# EAGLE board Main_Board_V1.0 (EAGLE 9.6.2)
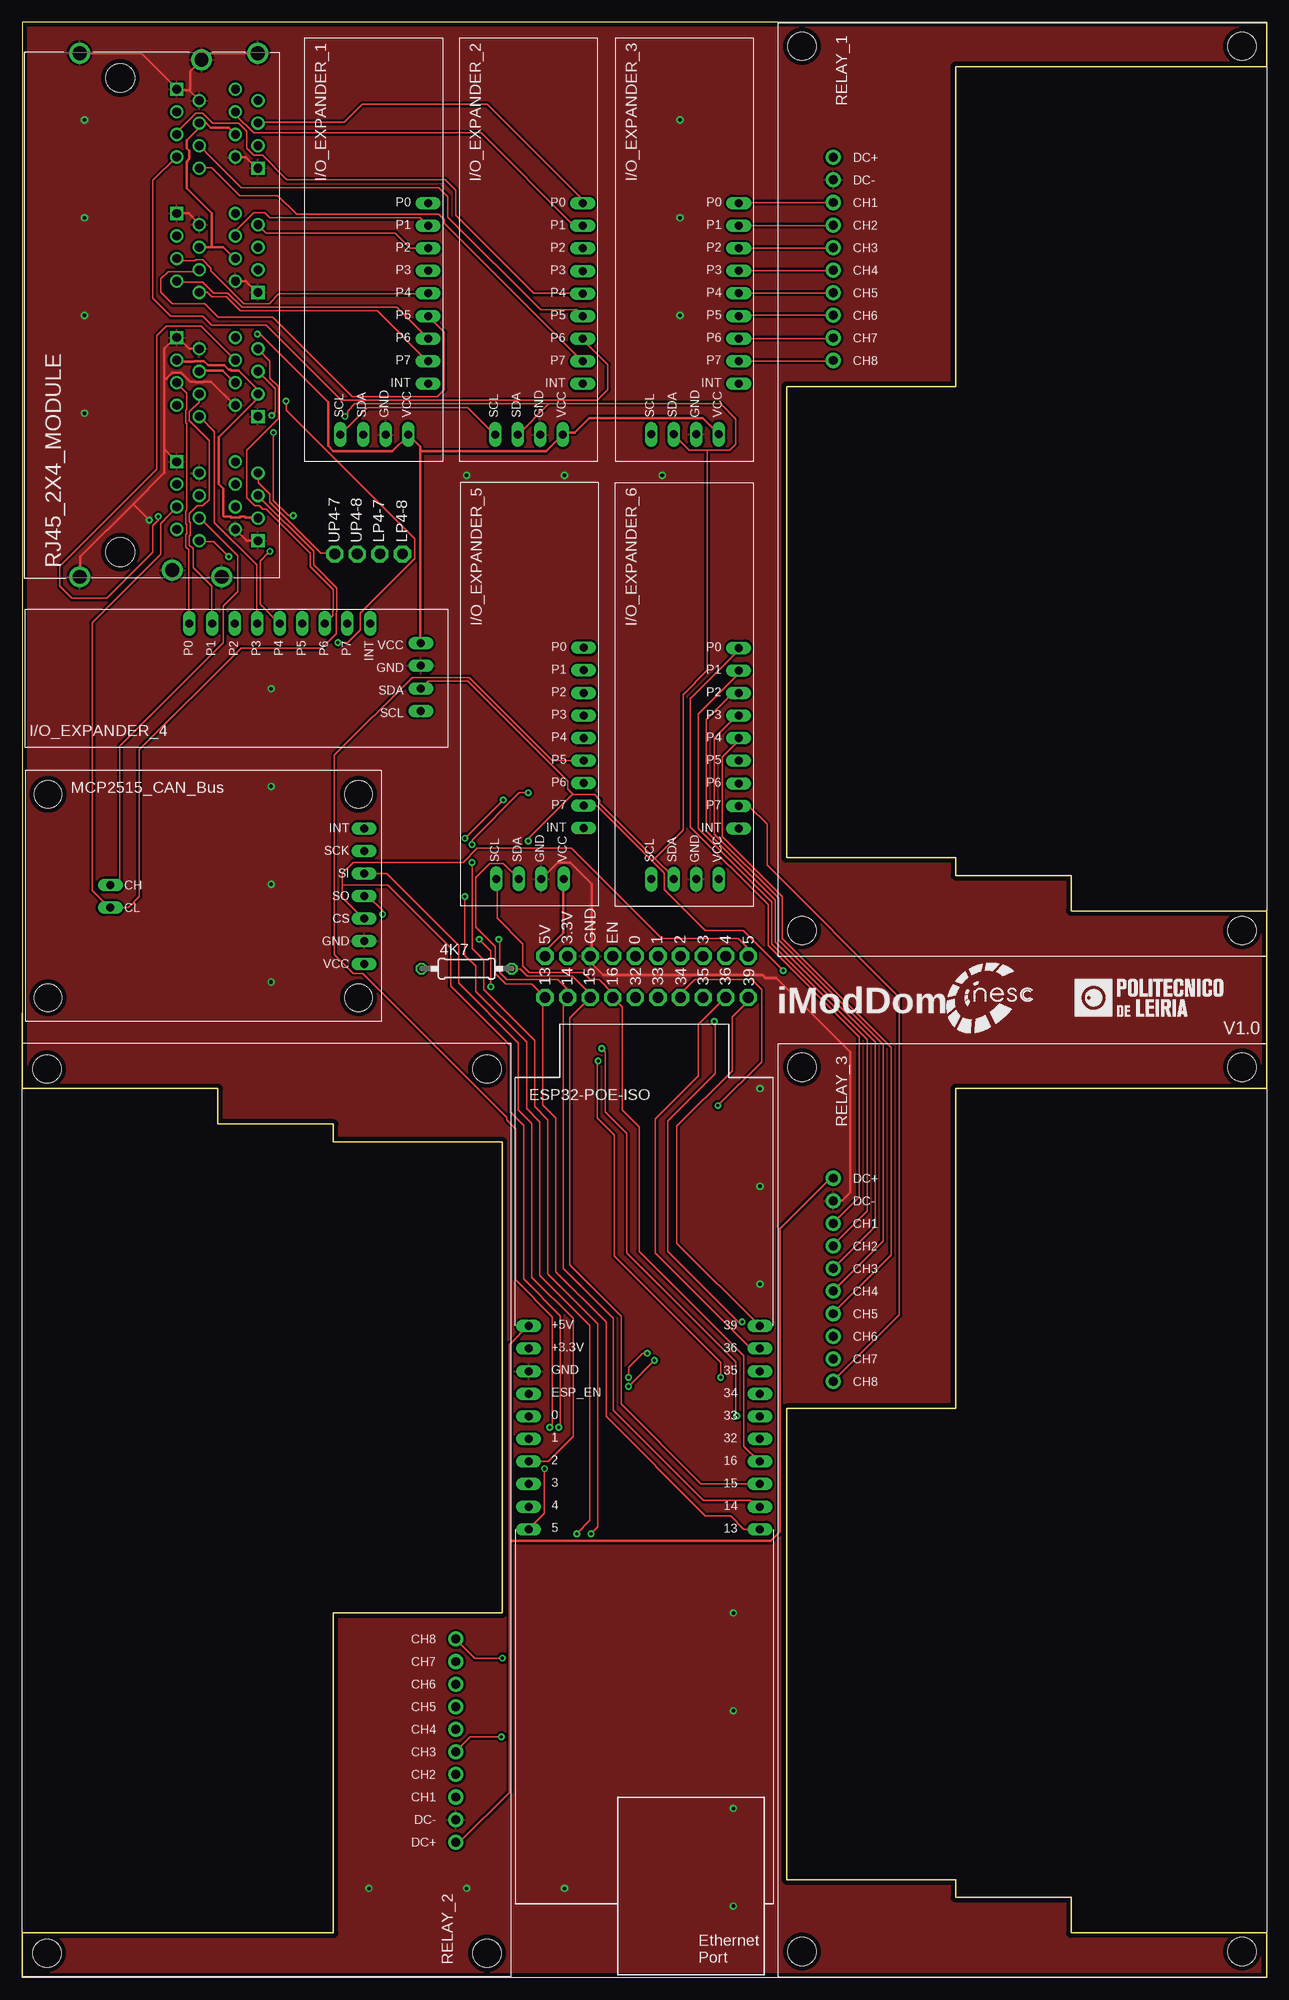
[diagram p0: board, top side]
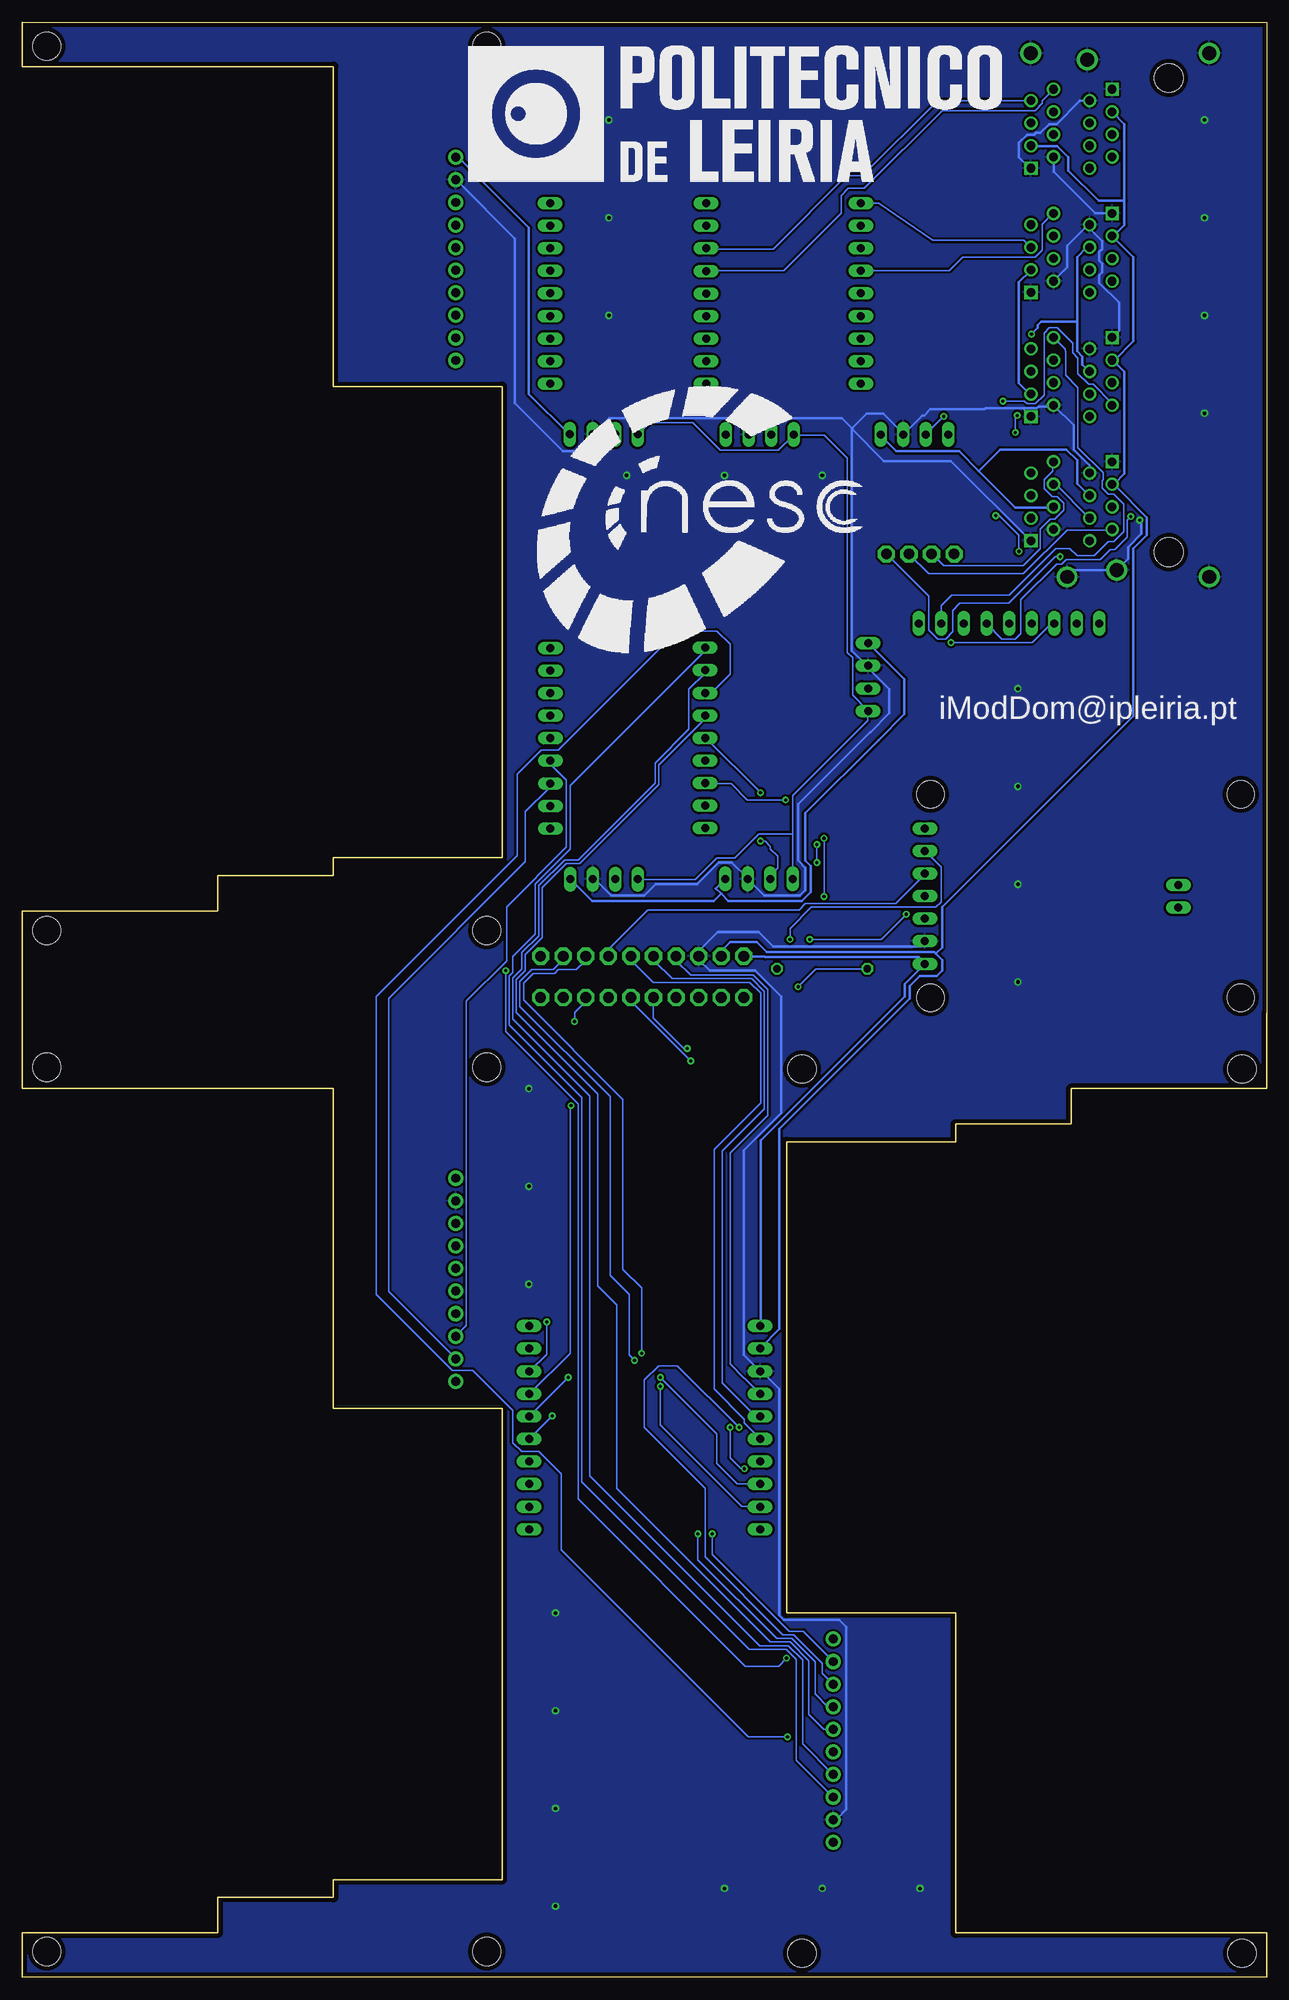
[diagram p1: board, bottom side, seen from below]

Size 140 x 220 mm. Coordinates in mm from the lower left corner, seen from the top.
Outline: 0,0 140,0 140,5 118,5 118,9 105,9 105,11 86,11 86,64 105,64 105,100 140,100 140,120 118,120 118,124 105,124 105,126 86,126 86,179 105,179 105,215 140,215 140,220 0,220 0,108.5 0,100 22,100 22,96 35,96 35,94 54,94 54,41 35,41 35,5 0,5 0,0
Copper layers (1*16): Top 0.035mm / dielectric 1.5mm / Bottom 0.035mm
Design rules "default *": minimum track width 6mil, minimum drill 0.35mm, track to track 0.25mm, track to pad 0.25mm, pad to pad 6mil, via to via 6mil, smd to smd 6mil, copper to edge 0.5mm, drill to drill 6mil, minimum pad ring 10mil, minimum via ring 8mil, stop-mask expansion 4mil, vias tented up to drill 0mil, thermal gap 10mil
Net classes: 0 default: width 0.15 mm; 1 +5V: width 0.305 mm; 2 GND: width 0.305 mm; 3 +3.3V: width 0.305 mm; 4 SCL: width 0.15 mm; 5 SDA: width 0.15 mm

## Footprints (pad centres in the part's own frame; a part is rotated, then mirrored left to right if it is on the bottom)
0207/10 = drill 0.813 octagon: 1 -5.08,0; 2 5.08,0
ESP-POE = drill 0.9 pad 1.3 long: 0 0,-10.16; 1 0,-12.7; 2 0,-15.24; 3 0,-17.78; 3V3 0,-2.54; 4 0,-20.32; 5 0,-22.86; 5V 0,0; 13 26,-22.86; 14 26,-20.32; 15 26,-17.78; 16 26,-15.24; 32 26,-12.7; 33 26,-10.16; 34 26,-7.62; 35 26,-5.08; 36 26,-2.54; 39 26,0; ESP_EN 0,-7.62; GND 0,-5.08
PCF8574-MODULE_ESPELHADO = drill 0.9 pad 1.3 long: GND 0,-5.08; INT 5.71,-9.85; P0 26.03,-9.85; P1 23.49,-9.85; P2 20.95,-9.85; P3 18.41,-9.85; P4 15.87,-9.85; P5 13.33,-9.85; P6 10.79,-9.85; P7 8.25,-9.85; SCL 0,0; SDA 0,-2.54; VCC 0,-7.62
SSR_M_SEM_LIGACOES = drill 1 pad 1.7: CH1 17.58,3.5; CH2 20.12,3.5; CH3 22.66,3.5; CH4 25.2,3.5; CH5 27.74,3.5; CH6 30.28,3.5; CH7 32.82,3.5; CH8 35.36,3.5; DC+ 12.5,3.5; DC- 15.04,3.5 | hole 3.2: 0,0; 99.5,0; 99.5,49.5; 0,49.5
TE_5569262-1 = drill 0.97 square: LP1-1 0,0; LP2-1 13.97,0; LP3-1 27.94,0; LP4-1 41.91,0; UP1-1 8.89,9.14; UP2-1 22.86,9.14; UP3-1 36.83,9.14; UP4-1 50.8,9.14 | drill 0.97: LP1-2 1.27,2.54; LP1-3 2.54,0; LP1-4 3.81,2.54; LP1-5 5.08,0; LP1-6 6.35,2.54; LP1-7 7.62,0; LP1-8 8.89,2.54; LP2-2 15.24,2.54; LP2-3 16.51,0; LP2-4 17.78,2.54; LP2-5 19.05,0; LP2-6 20.32,2.54; LP2-7 21.59,0; LP2-8 22.86,2.54; LP3-2 29.21,2.54; LP3-3 30.48,0; LP3-4 31.75,2.54; LP3-5 33.02,0; LP3-6 34.29,2.54; LP3-7 35.56,0; LP3-8 36.83,2.54; LP4-2 43.18,2.54; LP4-3 44.45,0; LP4-4 45.72,2.54; LP4-5 46.99,0; LP4-6 48.26,2.54; LP4-7 49.53,0; LP4-8 50.8,2.54; UP1-2 7.62,6.6; UP1-3 6.35,9.14; UP1-4 5.08,6.6; UP1-5 3.81,9.14; UP1-6 2.54,6.6; UP1-7 1.27,9.14; UP1-8 0,6.6; UP2-2 21.59,6.6; UP2-3 20.32,9.14; UP2-4 19.05,6.6; UP2-5 17.78,9.14; UP2-6 16.51,6.6; UP2-7 15.24,9.14; UP2-8 13.97,6.6; UP3-2 35.56,6.6; UP3-3 34.29,9.14; UP3-4 33.02,6.6; UP3-5 31.75,9.14; UP3-6 30.48,6.6; UP3-7 29.21,9.14; UP3-8 27.94,6.6; UP4-2 49.53,6.6; UP4-3 48.26,9.14; UP4-4 46.99,6.6; UP4-5 45.72,9.14; UP4-6 44.45,6.6; UP4-7 43.18,9.14; UP4-8 41.91,6.6 | drill 1.57: S1 -4.06,-10.92; S2 54.87,-10.92; S3 -4.06,9.14; S4 54.11,-0.51; S5 -3.3,2.79; S6 54.87,5.08 | hole 3.25: -1.27,-6.35; 52.08,-6.35
TP = drill 1.2 pad 1.93 octagon: P$1 0,0
MCP2515_MODULE_SEM_LIGACOES = drill 0.9 pad 1.3 long: CH -27.925,12.703; CL -27.925,10.163; CS 0.605,8.923; GND 0.605,6.383; INT 0.605,19.083; MISO 0.605,11.463; MOSI 0.605,14.003; SCK 0.605,16.543; VCC 0.605,3.843 | hole 3.1: -0.035,0.013; -0.035,22.913; -34.935,22.913; -34.935,0.013

## Placement (x,y rotation side)
4K7  [0207/10]  50,113.5 0 top
ESP32-POE-ISO  ESP-POE  [ESP-POE]  56.98,73.28 0 top
I/O_EXPANDER_1  PCF8574-MODULE_ESPELHADO  [PCF8574-MODULE_ESPELHADO]  35.81,173.62 90 top
I/O_EXPANDER_2  PCF8574-MODULE_ESPELHADO  [PCF8574-MODULE_ESPELHADO]  53.21,173.6 90 top
I/O_EXPANDER_3  PCF8574-MODULE_ESPELHADO  [PCF8574-MODULE_ESPELHADO]  70.76,173.62 90 top
I/O_EXPANDER_4  PCF8574-MODULE_ESPELHADO  [PCF8574-MODULE_ESPELHADO]  44.84,142.5 180 top
I/O_EXPANDER_5  PCF8574-MODULE_ESPELHADO  [PCF8574-MODULE_ESPELHADO]  53.32,123.59 90 top
I/O_EXPANDER_6  PCF8574-MODULE_ESPELHADO  [PCF8574-MODULE_ESPELHADO]  70.74,123.56 90 top
RELAY_1  SSR_M_FULL_SEM_LIGACOES  [SSR_M_SEM_LIGACOES]  87.74,217.3 270 top
RELAY_2  SSR_M_FULL_SEM_LIGACOES  [SSR_M_SEM_LIGACOES]  52.28,2.7 90 top
RELAY_3  SSR_M_FULL_SEM_LIGACOES  [SSR_M_SEM_LIGACOES]  87.74,102.41 270 top
RJ45_2X4_MODULE  5569262-1  [TE_5569262-1]  17.38,212.46 270 top
U$1  TP  [TP]  35.16,160.16 90 top
U$2  TP  [TP]  58.82,114.9 90 top
U$4  TP  [TP]  37.7,160.16 0 bottom
U$5  TP  [TP]  40.24,160.16 0 top
U$6  TP  [TP]  61.36,114.9 90 bottom
U$7  TP  [TP]  63.9,114.9 90 top
U$8  TP  [TP]  66.44,114.9 90 top
U$9  TP  [TP]  68.98,114.9 90 top
U$10  TP  [TP]  71.52,114.9 90 top
U$11  TP  [TP]  74.06,114.9 90 top
U$12  TP  [TP]  76.6,114.9 90 bottom
U$13  TP  [TP]  79.14,114.9 90 bottom
U$14  TP  [TP]  81.68,114.9 90 top
U$15  TP  [TP]  81.68,110.26 270 bottom
U$16  TP  [TP]  79.14,110.26 270 top
U$17  TP  [TP]  76.6,110.26 270 top
U$18  TP  [TP]  74.06,110.26 270 top
U$19  TP  [TP]  71.52,110.26 270 top
U$20  TP  [TP]  68.98,110.26 270 top
U$21  TP  [TP]  66.44,110.26 270 top
U$22  TP  [TP]  63.9,110.26 270 top
U$23  TP  [TP]  61.36,110.26 270 top
U$24  TP  [TP]  58.82,110.26 270 top
U$25  TP  [TP]  42.78,160.16 0 top
U$26  MCP2515_MODULE_SEM_LIGACOES  [MCP2515_MODULE_SEM_LIGACOES]  37.85,110.2 0 top

## Library data of the parts
4K7 = rcl; SPICEPREFIX: R
ESP32-POE-ISO = ESP-POE-RevB
I/O_EXPANDER_1-I/O_EXPANDER_6 = PCF8574_Module
RELAY_1-RELAY_3 = Solid-State-Relay_Module
RJ45_2X4_MODULE = RJ45_2x4; AVAILABILITY: Good; CENTERLINE_PITCH: 1.02 mm[.04 in]; COMMENT: 5569262-1; DESCRIPTION: Conn RJ-45 F 64 POS 2.54mm Solder RA Thru-Hole 64 Terminal 8 Port Cat 5 Tray; EU_ROHS_COMPLIANCE: Compliant; MF: TE Connectivity; MP: 5569262-1; NUMBER_OF_POSITIONS: 8; PACKAGE: None; PRICE: None; PURCHASE-URL: https://pricing.snapeda.com/search/part/5569262-1/?ref=eda
U$1 U$2 U$4-U$25 = edurobotParts
U$26 = MCP2515_Module

## Nets
+3V3 [+3.3V]: ESP32-POE-ISO.3V3 RJ45_2X4_MODULE.LP1-3 RJ45_2X4_MODULE.LP2-3 RJ45_2X4_MODULE.LP3-3 RJ45_2X4_MODULE.LP4-3 RJ45_2X4_MODULE.UP1-3 RJ45_2X4_MODULE.UP2-3 RJ45_2X4_MODULE.UP3-3 RJ45_2X4_MODULE.UP4-3 U$6.P$1
+5V [+5V]: ESP32-POE-ISO.5V I/O_EXPANDER_1.VCC I/O_EXPANDER_2.VCC I/O_EXPANDER_3.VCC I/O_EXPANDER_4.VCC I/O_EXPANDER_5.VCC I/O_EXPANDER_6.VCC RELAY_1.DC+ RELAY_2.DC+ RELAY_3.DC+ RJ45_2X4_MODULE.LP1-4 RJ45_2X4_MODULE.LP2-4 RJ45_2X4_MODULE.LP3-4 RJ45_2X4_MODULE.LP4-4 RJ45_2X4_MODULE.UP1-4 RJ45_2X4_MODULE.UP2-4 RJ45_2X4_MODULE.UP3-4 RJ45_2X4_MODULE.UP4-4 U$2.P$1 U$26.VCC
GND [GND]: ESP32-POE-ISO.GND I/O_EXPANDER_1.GND I/O_EXPANDER_2.GND I/O_EXPANDER_3.GND I/O_EXPANDER_4.GND I/O_EXPANDER_5.GND I/O_EXPANDER_6.GND RELAY_1.DC- RELAY_2.DC- RELAY_3.DC- RJ45_2X4_MODULE.LP1-1 RJ45_2X4_MODULE.LP1-2 RJ45_2X4_MODULE.LP2-1 RJ45_2X4_MODULE.LP2-2 RJ45_2X4_MODULE.LP3-1 RJ45_2X4_MODULE.LP3-2 RJ45_2X4_MODULE.LP4-1 RJ45_2X4_MODULE.LP4-2 RJ45_2X4_MODULE.S1 RJ45_2X4_MODULE.S2 RJ45_2X4_MODULE.S3 RJ45_2X4_MODULE.S4 RJ45_2X4_MODULE.S5 RJ45_2X4_MODULE.S6 RJ45_2X4_MODULE.UP1-1 RJ45_2X4_MODULE.UP1-2 RJ45_2X4_MODULE.UP2-1 RJ45_2X4_MODULE.UP2-2 RJ45_2X4_MODULE.UP3-1 RJ45_2X4_MODULE.UP3-2 RJ45_2X4_MODULE.UP4-1 RJ45_2X4_MODULE.UP4-2 U$7.P$1 U$26.GND
N$1 [SCL]: I/O_EXPANDER_1.P7 RJ45_2X4_MODULE.LP2-8
N$2 [SCL]: I/O_EXPANDER_1.P6 RJ45_2X4_MODULE.LP2-7
N$3 [SCL]: I/O_EXPANDER_1.P5 RJ45_2X4_MODULE.LP2-6
N$4: ESP32-POE-ISO.ESP_EN U$8.P$1
N$5: ESP32-POE-ISO.0 U$9.P$1
N$6: ESP32-POE-ISO.1 U$10.P$1
N$7: ESP32-POE-ISO.2 U$11.P$1 U$26.MOSI
N$8: ESP32-POE-ISO.3 U$12.P$1
N$9: ESP32-POE-ISO.4 U$13.P$1
N$10: ESP32-POE-ISO.5 U$14.P$1 U$26.CS
N$11: ESP32-POE-ISO.39 U$15.P$1
N$12: ESP32-POE-ISO.36 U$16.P$1
N$13: ESP32-POE-ISO.35 U$17.P$1
N$14: ESP32-POE-ISO.34 U$18.P$1
N$15: ESP32-POE-ISO.33 U$19.P$1
N$16: ESP32-POE-ISO.32 U$20.P$1
N$18: 4K7.2 ESP32-POE-ISO.15 U$22.P$1
N$19: ESP32-POE-ISO.14 U$23.P$1 U$26.SCK
N$21: I/O_EXPANDER_3.P0 RELAY_1.CH1
N$22: I/O_EXPANDER_3.P1 RELAY_1.CH2
N$23: I/O_EXPANDER_3.P2 RELAY_1.CH3
N$24: I/O_EXPANDER_3.P3 RELAY_1.CH4
N$25: I/O_EXPANDER_3.P4 RELAY_1.CH5
N$26 [SCL]: I/O_EXPANDER_1.P4 RJ45_2X4_MODULE.LP2-5
N$27: I/O_EXPANDER_3.P5 RELAY_1.CH6
N$28: I/O_EXPANDER_3.P6 RELAY_1.CH7
N$29: I/O_EXPANDER_3.P7 RELAY_1.CH8
N$30: I/O_EXPANDER_6.P0 RELAY_3.CH1
N$31: I/O_EXPANDER_6.P1 RELAY_3.CH2
N$32: I/O_EXPANDER_6.P2 RELAY_3.CH3
N$33: I/O_EXPANDER_6.P3 RELAY_3.CH4
N$34: I/O_EXPANDER_6.P4 RELAY_3.CH5
N$35: I/O_EXPANDER_6.P5 RELAY_3.CH6
N$36: I/O_EXPANDER_6.P6 RELAY_3.CH7
N$37: I/O_EXPANDER_6.P7 RELAY_3.CH8
N$38: I/O_EXPANDER_5.P0 RELAY_2.CH1
N$39: I/O_EXPANDER_5.P1 RELAY_2.CH2
N$40: I/O_EXPANDER_5.P2 RELAY_2.CH3
N$41: I/O_EXPANDER_5.P3 RELAY_2.CH4
N$42: I/O_EXPANDER_5.P4 RELAY_2.CH5
N$43: I/O_EXPANDER_5.P5 RELAY_2.CH6
N$44: I/O_EXPANDER_5.P6 RELAY_2.CH7
N$45: I/O_EXPANDER_5.P7 RELAY_2.CH8
N$46 [SCL]: I/O_EXPANDER_1.P3 RJ45_2X4_MODULE.UP2-8
N$47 [SCL]: I/O_EXPANDER_1.P2 RJ45_2X4_MODULE.UP2-7
N$48 [SCL]: I/O_EXPANDER_1.P1 RJ45_2X4_MODULE.UP2-6
N$49 [SCL]: I/O_EXPANDER_1.P0 RJ45_2X4_MODULE.UP2-5
N$50 [SCL]: I/O_EXPANDER_2.P0 RJ45_2X4_MODULE.UP1-5
N$51 [SCL]: I/O_EXPANDER_2.P1 RJ45_2X4_MODULE.UP1-6
N$52 [SCL]: I/O_EXPANDER_2.P2 RJ45_2X4_MODULE.UP1-7
N$53 [SCL]: I/O_EXPANDER_2.P3 RJ45_2X4_MODULE.UP1-8
N$54 [SCL]: I/O_EXPANDER_2.P4 RJ45_2X4_MODULE.LP1-5
N$55 [SCL]: I/O_EXPANDER_2.P5 RJ45_2X4_MODULE.LP1-6
N$56 [SCL]: I/O_EXPANDER_2.P6 RJ45_2X4_MODULE.LP1-7
N$57 [SCL]: I/O_EXPANDER_2.P7 RJ45_2X4_MODULE.LP1-8
N$58 [SCL]: RJ45_2X4_MODULE.LP4-5 RJ45_2X4_MODULE.UP4-5 U$26.CL
N$60 [SCL]: I/O_EXPANDER_4.P7 RJ45_2X4_MODULE.UP3-8
N$61 [SCL]: I/O_EXPANDER_4.P6 RJ45_2X4_MODULE.UP3-7
N$62 [SCL]: I/O_EXPANDER_4.P5 RJ45_2X4_MODULE.UP3-6
N$63 [SCL]: I/O_EXPANDER_4.P4 RJ45_2X4_MODULE.UP3-5
N$64: I/O_EXPANDER_4.P0 RJ45_2X4_MODULE.LP3-5
N$65: I/O_EXPANDER_4.P1 RJ45_2X4_MODULE.LP3-6
N$66: I/O_EXPANDER_4.P2 RJ45_2X4_MODULE.LP3-7
N$67: I/O_EXPANDER_4.P3 RJ45_2X4_MODULE.LP3-8
N$68: 4K7.1 U$26.MISO
N$69: RJ45_2X4_MODULE.UP4-7 U$1.P$1
N$70: RJ45_2X4_MODULE.UP4-8 U$4.P$1
N$71: RJ45_2X4_MODULE.LP4-7 U$5.P$1
N$72: RJ45_2X4_MODULE.LP4-8 U$25.P$1
N$73 [SCL]: RJ45_2X4_MODULE.LP4-6 RJ45_2X4_MODULE.UP4-6 U$26.CH
SCL: ESP32-POE-ISO.16 I/O_EXPANDER_1.SCL I/O_EXPANDER_2.SCL I/O_EXPANDER_3.SCL I/O_EXPANDER_4.SCL I/O_EXPANDER_5.SCL I/O_EXPANDER_6.SCL U$21.P$1
SDA: ESP32-POE-ISO.13 I/O_EXPANDER_1.SDA I/O_EXPANDER_2.SDA I/O_EXPANDER_3.SDA I/O_EXPANDER_4.SDA I/O_EXPANDER_5.SDA I/O_EXPANDER_6.SDA U$24.P$1

## Tracks (layer width: path | path; a pad name or v marks a point on that pad's centre or on a via)
+3V3
  Top 0.305: RJ45_2X4_MODULE.UP4-3 26.46,164.28 25.15,164.28 25.05,164.38 24.55,164.38 24.45,164.28 23.54,164.28 23.44,164.38 22.74,164.38 22.64,164.48 22.64,167.5 22.13,168 22.13,173.33 26.46,177.66 26.46,178.16 RJ45_2X4_MODULE.UP3-3 26.36,178.26 26.36,178.77 24.34,180.78 23.54,180.78 23.44,180.88 23.24,180.88 22.74,181.38 20.93,181.38 20.42,181.88 19.42,181.88 19.32,181.78 17.5,181.78 17.4,181.88 RJ45_2X4_MODULE.LP3-3
  Bottom 0.305: RJ45_2X4_MODULE.UP2-3 26.56,192.04 27.87,190.74 27.87,179.37 26.76,178.26 26.56,178.26 RJ45_2X4_MODULE.UP3-3 | 15.99,199.89 15.99,197.18 17.2,195.97 RJ45_2X4_MODULE.LP2-3 17.3,195.87 14.99,193.56 14.99,184.09 17.1,181.99 RJ45_2X4_MODULE.LP3-3 17.3,181.99 15.99,180.68 15.99,169.21 17.1,168.1 17.3,168.1 RJ45_2X4_MODULE.LP4-3 17,168 17,167.8 13.48,164.28 13.48,162.27 14.99,160.76 14.99,141.95 36.52,120.42 36.52,115.89 37.22,115.19 | 15.99,199.89 15.99,208.54 17.3,209.85 RJ45_2X4_MODULE.LP1-3 | 15.99,199.89 18.91,199.89 22.33,203.31 22.33,204.82 23.54,206.03 24.45,206.03 25.15,206.03 26.46,206.03 RJ45_2X4_MODULE.UP1-3 | 37.22,115.19 37.42,115.39 56.23,115.39 57.34,116.5 60.36,116.5 61.27,115.59 61.27,114.99 U$6.P$1 | 37.22,115.19 36.52,114.48 36.52,113.28 37.12,112.67 39.03,112.67 40.14,111.56 40.14,110.16 54.83,95.47 54.83,72.94 56.94,70.82 ESP32-POE-ISO.3V3
+5V  (via drill 0.35)
  Top 0.305: I/O_EXPANDER_3.VCC 78.37,173.64 76.56,175.45 63.77,175.45 62.17,173.84 61.07,173.84 60.86,173.64 I/O_EXPANDER_2.VCC 60.76,173.53 58.95,171.72 44.77,171.72 | RJ45_2X4_MODULE.UP1-4 23.94,207.44 23.24,208.14 21.23,208.14 20.72,208.64 20.02,208.64 RJ45_2X4_MODULE.LP1-4 19.82,208.54 19.82,208.04 18.51,206.73 18.51,205.83 18.81,205.53 18.81,204.62 18.51,204.32 18.51,201.3 21.33,198.48 21.33,194.66 | RJ45_2X4_MODULE.LP3-4 20.02,180.78 22.53,180.78 23.94,179.37 RJ45_2X4_MODULE.UP3-4 | 21.33,194.66 22.64,194.66 23.94,193.35 RJ45_2X4_MODULE.UP2-4 | 21.33,194.66 20.02,194.66 RJ45_2X4_MODULE.LP2-4 | 44.77,171.72 44.77,172.23 43.46,173.53 I/O_EXPANDER_1.VCC 43.36,173.43 41.65,171.72 35.01,171.72 34.41,172.33 34.41,177.26 26.76,184.9 v26.46,184.9 | 44.77,171.72 44.77,150.2 I/O_EXPANDER_4.VCC | I/O_EXPANDER_5.VCC 60.86,123.54 60.86,117.5 58.85,115.49 58.85,114.99 U$2.P$1 | 54.83,49.09 54.83,71.22 56.94,73.34 ESP32-POE-ISO.5V | 54.83,49.09 54.83,20.82 49.29,15.29 48.79,15.29 RELAY_2.DC+ | 54.83,49.09 84.2,49.09 85.21,50.1 85.21,84.2 90.84,89.84 91.14,89.84 RELAY_3.DC+
  Bottom 0.305: RELAY_1.DC+ 91.14,204.72 90.84,204.72 82.99,196.87 82.99,178.16 78.47,173.64 I/O_EXPANDER_3.VCC | 21.33,186.31 21.33,193.55 20.22,194.66 20.02,194.66 RJ45_2X4_MODULE.LP2-4 | 21.33,186.31 21.33,182.99 20.72,182.39 20.72,181.48 20.02,180.78 RJ45_2X4_MODULE.LP3-4 | 32.39,169.51 28.27,165.39 24.04,165.39 RJ45_2X4_MODULE.UP4-4 | 32.39,169.51 34.61,171.72 41.65,171.72 43.46,173.53 I/O_EXPANDER_1.VCC | 32.39,169.51 29.98,171.93 22.53,171.93 21.33,170.72 21.33,168.1 20.02,166.79 RJ45_2X4_MODULE.LP4-4 | 21.33,186.31 25.35,186.31 25.75,185.91 25.75,185.61 v26.46,184.9 | 61.38,121.94 62.19,121.12 75.85,121.12 78.27,123.54 I/O_EXPANDER_6.VCC | I/O_EXPANDER_5.VCC 60.96,123.54 61.97,122.53 61.38,121.94 | ESP32-POE-ISO.5V 56.94,73.34 56.93,73.35 56.93,94.17 40.74,110.36 40.74,111.77 38.47,114.04 U$26.VCC 38.45,114.11 39.13,114.78 56.44,114.78 56.54,114.89 58.75,114.89 U$2.P$1 | 61.38,121.94 60.56,121.12 52.31,121.12 51.31,122.13 51.31,125.05 51.91,125.65 51.91,130.99 43.67,139.24 43.66,139.24 40.75,142.14 40.75,146.08 44.77,150.09 I/O_EXPANDER_4.VCC
GND  (via drill 0.35, 0.4 pad 0.7)
  Top 0.305: 18.81,212.37 17.4,212.37 RJ45_2X4_MODULE.LP1-1 17.3,212.57 13.38,216.49 6.54,216.49 RJ45_2X4_MODULE.S1 | 18.81,212.37 19.92,211.26 RJ45_2X4_MODULE.LP1-2 | 18.81,212.37 18.91,212.47 18.91,214.48 20.12,215.69 RJ45_2X4_MODULE.S5 20.22,215.89 20.82,216.49 26.46,216.49 RJ45_2X4_MODULE.S3 | RJ45_2X4_MODULE.UP2-2 24.04,190.84 25.15,190.84 26.46,189.53 RJ45_2X4_MODULE.UP2-1 | RJ45_2X4_MODULE.LP2-1 17.4,198.48 18.71,198.48 19.92,197.28 RJ45_2X4_MODULE.LP2-2 | RJ45_2X4_MODULE.UP1-2 24.04,204.82 25.15,204.82 26.46,203.51 RJ45_2X4_MODULE.UP1-1 | 16.1,171.82 15.99,171.93 15.99,179.87 | 16.1,171.82 17.3,170.62 RJ45_2X4_MODULE.LP4-1 | 15.99,179.87 15.99,183.29 17.3,184.6 RJ45_2X4_MODULE.LP3-1 17.5,184.6 18.81,183.29 19.92,183.29 RJ45_2X4_MODULE.LP3-2 | 12.47,165.79 15.99,169.31 15.99,171.72 16.1,171.82 | 12.47,165.79 6.54,159.85 6.54,157.64 RJ45_2X4_MODULE.S2 | 12.47,165.79 v14.29,163.98 | RJ45_2X4_MODULE.UP4-1 26.46,161.66 25.25,161.66 24.04,162.87 RJ45_2X4_MODULE.UP4-2 | 15.99,179.87 16.2,179.87 16.9,180.58 17.91,180.58 18.91,179.57 19.42,179.57 19.52,179.47 20.32,179.47 20.42,179.57 21.23,179.57 23.94,176.85 RJ45_2X4_MODULE.UP3-2 | RELAY_3.DC- 91.24,87.42 92.25,87.42 93.16,88.33 93.16,104.13 84.82,112.47 83.59,112.47 83.29,112.78 65.39,112.78 63.98,114.18 63.98,114.89 U$7.P$1 64.08,114.99 64.08,123.03 61.67,125.45 60.26,125.45 58.45,123.64 I/O_EXPANDER_5.GND
  Bottom 0.305: RJ45_2X4_MODULE.LP2-1 19.3,198.49 23.98,203.16 RJ45_2X4_MODULE.UP1-2 | RJ45_2X4_MODULE.UP2-2 23.94,190.94 22.43,192.45 22.43,194.87 20.02,197.28 RJ45_2X4_MODULE.LP2-2 20.12,196.97 18.51,195.37 18.51,194.46 18.81,194.16 18.81,193.15 18.51,192.85 18.51,191.84 18.81,191.54 18.81,190.64 16.6,188.42 16.6,185.31 17.3,184.6 RJ45_2X4_MODULE.LP3-1 | RJ45_2X4_MODULE.S6 22.43,157.64 21.73,158.34 16.9,158.34 RJ45_2X4_MODULE.S4 16.8,158.44 15.59,159.65 15.59,160.96 14.08,162.47 14.08,163.78 v14.29,163.98 | RJ45_2X4_MODULE.LP1-2 20.02,211.16 21.02,211.16 23.64,208.54 24.45,208.54 25.45,207.54 25.95,207.54 26.16,207.34 26.96,207.34 27.87,206.43 27.87,204.82 26.56,203.51 RJ45_2X4_MODULE.UP1-1 | RJ45_2X4_MODULE.LP4-2 19.92,169.31 19.92,170.12 21.73,171.93 21.73,174.64 23.94,176.85 RJ45_2X4_MODULE.UP3-2 24.04,176.75 25.65,176.75 25.85,176.55 27.46,176.55 | 27.46,176.55 31.59,176.55 31.69,176.45 37.83,176.45 38.53,175.75 38.73,175.75 40.84,173.64 I/O_EXPANDER_1.GND 40.94,173.74 43.15,175.95 44.97,175.95 46.68,174.24 | 27.46,176.55 26.56,175.65 RJ45_2X4_MODULE.UP3-1 | 46.68,174.24 46.68,174.14 | 46.68,174.14 46.68,149.29 45.07,147.68 44.87,147.68 I/O_EXPANDER_4.GND 44.77,147.48 44.77,147.28 42.46,144.97 42.46,142.25 44.56,140.14 44.57,140.14 52.72,132 52.72,125.65 51.91,124.84 51.91,122.33 52.51,121.73 56.54,121.73 58.35,123.54 I/O_EXPANDER_5.GND 58.35,123.64 60.16,125.45 61.67,125.45 64.08,123.03 68.71,123.03 70.02,121.73 73.74,121.73 75.55,123.54 75.75,123.54 I/O_EXPANDER_6.GND | 46.68,174.14 46.58,174.23 47.8,175.45 56.44,175.45 58.25,173.64 I/O_EXPANDER_2.GND 58.35,173.74 60.06,175.45 73.94,175.45 75.75,173.64 I/O_EXPANDER_3.GND 75.85,173.53 77.66,171.72 79.17,171.72 84.6,177.15 84.6,195.66 91.14,202.21 RELAY_1.DC-
  Bottom 0.305: 46.68,174.24 43.06,170.62 35.52,170.62 26.56,161.66 RJ45_2X4_MODULE.UP4-1 | RELAY_2.DC- 48.69,17.81 48.39,17.81 47.28,18.91 47.28,39.44 48.09,40.24 54.32,40.24 54.83,40.74 54.83,66.19 56.84,68.21 ESP32-POE-ISO.GND 57.04,68.21 58.85,70.02 58.85,93.06 54.63,97.28 54.63,110.36 57.54,113.28 62.67,113.28 63.88,114.48 63.88,114.78 U$7.P$1 63.88,114.99 63.88,115.49 61.77,117.6 57.14,117.6 55.53,115.99 38.93,115.99 38.93,116.11 U$26.GND
  other vias: 7,198 7,176 7,187 7,209 74,187 74,198 74,209 28,145 28,134 28,123 28,112 80,41 80,30 80,19 80,8 83,100 83,89 83,78 50,169 61,169 72,169 61,10 50,10 39,10
  pour Top: -10,230 -10,-10 150,-10 150,230
  pour Bottom: -10,230 150,230 150,-10 -10,-10
N$1
  Top 0.152: I/O_EXPANDER_1.P7 45.57,181.88 39.94,187.52 24.55,187.52 22.94,189.13 21.33,189.13 20.82,189.63 20.02,189.63 RJ45_2X4_MODULE.LP2-8
N$2
  Top 0.152: I/O_EXPANDER_1.P6 45.57,184.5 42.15,187.92 24.75,187.92 23.14,189.53 21.53,189.53 20.32,190.74 17.5,190.74 17.4,190.84 RJ45_2X4_MODULE.LP2-7
N$3
  Top 0.152: I/O_EXPANDER_1.P5 45.67,186.91 47.48,185.1 47.48,178.67 46.68,177.86 37.11,177.86 28.16,186.81 23.64,186.81 22.03,186.81 20.52,188.32 16.9,188.32 15.6,189.63 15.6,191.14 16.4,191.94 19.82,191.94 19.92,192.04 RJ45_2X4_MODULE.LP2-6
N$4
  Bottom 0.152: ESP32-POE-ISO.ESP_EN 58.7,67.38 58.76,67.41 60.35,69.01 60.35,92.76 56.13,96.98 56.13,111.16 57.74,112.77 64.79,112.77 66.4,114.38 66.4,114.89 U$8.P$1
N$5
  Bottom 0.152: ESP32-POE-ISO.0 57.04,63.18 57.54,63.18 61.26,66.89 61.26,92.96 56.53,97.68 56.53,110.96 57.95,112.37 66.9,112.37 68.91,114.38 68.91,114.89 U$9.P$1
N$6
  Bottom 0.152: ESP32-POE-ISO.1 57.04,60.66 58.75,62.37 58.75,62.78 62.16,66.19 62.16,93.16 56.93,98.38 56.93,110.75 58.15,111.97 69.01,111.97 71.43,114.38 71.43,114.89 U$10.P$1
N$7
  Top 0.152: ESP32-POE-ISO.2 57.04,58.05 59.15,58.05 61.97,60.86 61.97,74.14 57.34,78.77 57.34,96.07 55.83,97.57 55.83,105.13 49.1,111.86 49.1,116.09 40.98,124.2 U$26.MOSI
  Bottom 0.152: U$11.P$1 74.04,114.99 74.04,115.69 69.61,120.12 52.61,120.12 51.91,120.82 41.75,120.82 38.45,124.11 U$26.MOSI
N$8  (via drill 0.35)
  Top 0.152: v70.32,70.22 69.83,70.22 68.21,68.6 v68.21,67.5
  Bottom 0.152: v68.21,67.5 61.87,61.16 61.87,57.85 59.55,55.53 57.04,55.53 ESP32-POE-ISO.3 | v70.32,70.22 v70.33,70.22 70.33,77.56 72.44,79.68 72.44,98.79 83.6,109.95 83.6,111.87 82.49,112.97 80.08,112.97 79.67,113.38 77.66,113.38 76.66,114.38 76.66,114.89 U$12.P$1
N$9  (via drill 0.35)
  Top 0.152: v71.12,69.41 v68.21,66.5
  Bottom 0.152: v68.21,66.5 68.21,62.18 59.04,53.02 57.04,53.02 ESP32-POE-ISO.4 | v71.12,69.41 71.73,70.02 71.73,76.86 73.85,78.98 73.85,99.09 84,109.25 84,112.07 82.69,113.38 80.28,113.38 79.17,114.48 79.17,114.89 U$13.P$1
N$10  (via drill 0.35)
  Top 0.152: 36.02,122.93 36.02,124.24 37.22,125.45 49.6,125.45 51.2,127.06 61.76,127.06 71.93,116.89 80.58,116.89 81.59,115.89 81.59,114.99 U$14.P$1 | 36.02,122.93 36.02,121.53 38.33,119.21 38.43,119.21 U$26.CS | v58.75,57.24 58.75,52.21 57.04,50.5 ESP32-POE-ISO.5 | v60.36,61.87 60.55,62.06 60.55,74.45 56.43,78.57 56.43,95.87 54.93,97.37 54.93,104.83 48.19,111.56 48.19,115.89 48.18,115.89 41.14,122.93 36.02,122.93
  Bottom 0.152: v58.75,57.24 59.15,57.24 60.36,58.45 v60.36,61.87
N$11
  Top 0.152: ESP32-POE-ISO.39 82.89,73.34 73.64,82.59 73.64,95.77 79.86,102 79.86,108.03 81.59,109.75 81.59,110.26 U$15.P$1
N$12
  Top 0.152: ESP32-POE-ISO.36 81.98,70.74 81.89,70.82 71.23,81.49 71.23,96.57 76.06,101.4 76.06,107.24 79.07,110.25 79.07,110.26 U$16.P$1
N$13  (via drill 0.35)
  Top 0.152: v80.98,73.74 80.58,73.74 72.63,81.69 72.63,96.37 77.96,101.7 77.96,107.44 v77.86,107.54
  Bottom 0.152: v80.98,73.74 80.98,70.12 82.89,68.21 ESP32-POE-ISO.35 | v77.86,107.54 77.86,108.55 76.66,109.75 76.66,110.26 U$17.P$1
N$14  (via drill 0.35)
  Top 0.152: v78.27,98.08 83.2,103.01 83.2,111.16 82.09,112.27 75.65,112.27 74.14,110.76 74.14,110.36 U$18.P$1
  Bottom 0.152: v78.27,98.08 78.36,97.99 78.36,70.23 82.89,65.69 ESP32-POE-ISO.34
N$15  (via drill 0.35)
  Top 0.152: v78.57,67.5 78.57,69.19 66.6,81.16 66.6,94.77 64.69,96.68 64.69,103.02 v64.79,103.11
  Bottom 0.152: v78.57,67.5 82.89,63.18 ESP32-POE-ISO.33 | v64.79,103.11 71.43,109.75 71.43,110.26 U$19.P$1
N$16  (via drill 0.35)
  Top 0.152: v80.38,63.18 80.28,63.27 80.28,69.23 68.01,81.5 68.01,94.97 65.59,97.38 65.59,104.12 v65.19,104.52
  Bottom 0.152: v80.38,63.18 82.89,60.66 ESP32-POE-ISO.32 | v65.19,104.52 65.59,104.52 69.01,107.94 69.01,110.26 U$20.P$1
N$18
  Top 0.152: 4K7.2 55.13,113.48 56.03,113.48 56.84,112.67 61.87,112.67 63.88,110.66 63.88,110.36 U$22.P$1 63.88,110.26 61.58,107.96 61.58,80.15 67.38,74.34 67.38,64.5 76.33,55.55 81.97,55.55 81.98,55.53 82.89,55.53 ESP32-POE-ISO.15
N$19  (via drill 0.35)
  Top 0.152: v53.62,116.8 53.72,116.7 53.72,113.08 54.53,112.27 60.26,112.27 61.27,111.26 61.27,110.36 U$23.P$1 61.37,110.09 60.85,109.57 60.85,79.78 66.48,74.14 66.48,63.8 76.63,53.64 81.91,53.64 ESP32-POE-ISO.14
  Bottom 0.152: v53.62,116.8 53.62,118.01 51.21,120.42 37.22,120.42 36.62,121.02 36.62,124.94 38.33,126.66 38.43,126.66 U$26.SCK
N$21
  Top 0.152: I/O_EXPANDER_3.P0 80.68,199.69 91.14,199.69 RELAY_1.CH1
N$22
  Top 0.152: RELAY_1.CH2 91.15,197.09 80.63,197.09 I/O_EXPANDER_3.P1
N$23
  Top 0.152: I/O_EXPANDER_3.P2 80.68,194.56 91.14,194.56 RELAY_1.CH3
N$24
  Top 0.152: I/O_EXPANDER_3.P3 80.68,192.04 91.14,192.04 RELAY_1.CH4
N$25
  Top 0.152: I/O_EXPANDER_3.P4 80.68,189.53 91.14,189.53 RELAY_1.CH5
N$26
  Top 0.152: I/O_EXPANDER_1.P4 45.57,189.43 28.87,189.43 27.77,188.32 24.95,188.32 21.23,192.04 21.23,192.35 20.32,193.25 19.52,193.25 19.42,193.15 17.61,193.15 17.4,193.35 RJ45_2X4_MODULE.LP2-5
N$27
  Top 0.152: I/O_EXPANDER_3.P5 80.68,187.01 91.14,187.01 RELAY_1.CH6
N$28
  Top 0.152: I/O_EXPANDER_3.P6 80.68,184.4 91.14,184.4 RELAY_1.CH7
N$29
  Top 0.152: I/O_EXPANDER_3.P7 80.68,181.88 91.14,181.88 RELAY_1.CH8
N$30
  Top 0.152: I/O_EXPANDER_6.P0 80.58,149.49 80.58,149.29 75.16,143.87 75.16,129.46 83.9,120.72 83.9,116.09 94.16,105.83 94.16,87.82 91.24,84.91 RELAY_3.CH1
N$31
  Top 0.152: I/O_EXPANDER_6.P1 80.58,146.98 80.58,146.68 76.06,142.16 76.06,129.26 84.3,121.03 84.3,116.29 95.06,105.53 95.06,86.21 91.24,82.39 RELAY_3.CH2
N$32
  Top 0.152: I/O_EXPANDER_6.P2 79.93,144.51 76.97,141.54 76.97,128.97 84.7,121.23 84.7,116.5 95.96,105.24 95.96,84.5 91.24,79.78 RELAY_3.CH3
N$33
  Top 0.152: I/O_EXPANDER_6.P3 80.41,141.97 77.87,139.43 77.87,128.67 85.11,121.43 85.11,116.7 96.87,104.94 96.87,82.88 91.24,77.26 RELAY_3.CH4
N$34
  Top 0.152: I/O_EXPANDER_6.P4 80.58,139.13 78.77,137.32 78.77,128.37 85.51,121.63 85.51,116.9 97.77,104.64 97.77,81.27 91.24,74.75 RELAY_3.CH5
N$35
  Bottom 0.152: I/O_EXPANDER_6.P5 80.58,136.82 80.58,136.51 78.77,134.7 78.77,127.16 85.51,120.42 85.51,114.38 90.04,109.86 90.04,73.34 91.14,72.23 RELAY_3.CH6
N$36
  Bottom 0.152: I/O_EXPANDER_6.P6 80.68,134.3 80.68,133.9 83.41,131.17 83.41,125.54 98.79,110.16 98.79,77.16 91.24,69.61 RELAY_3.CH7
N$37
  Top 0.152: I/O_EXPANDER_6.P7 81.75,131.81 83.81,129.76 83.81,125.14 98.67,110.28 98.67,74.53 91.24,67.1 RELAY_3.CH8
N$38
  Bottom 0.152: I/O_EXPANDER_5.P0 63.18,149.59 63.18,149.29 78.37,134.1 78.37,126.96 82.29,123.03 82.29,117.4 84.81,114.89 84.81,113.07 85.21,112.67 85.21,107.14 77.05,98.98 77.05,55.75 58.23,36.92 54.02,36.92 52.91,35.81 52.91,24.44 48.79,20.32 RELAY_2.CH1
N$39
  Bottom 0.152: I/O_EXPANDER_5.P1 63.18,146.98 63.18,146.78 64.99,144.97 64.99,140.44 68.81,136.62 68.81,134.4 77.46,125.75 78.97,125.75 81.89,122.83 81.89,117.2 83.8,115.29 83.8,113.48 84.81,112.47 84.81,107.84 76.15,99.19 76.15,56.45 57.02,37.32 53.82,37.32 52.2,35.71 52.2,26.25 48.79,22.84 RELAY_2.CH2
N$40  (via drill 0.35)
  Top 0.152: v53.91,27.06 50.4,27.06 48.79,25.45 RELAY_2.CH3
  Bottom 0.152: I/O_EXPANDER_5.P2 62.51,144.53 60.37,146.68 60.37,150 61.87,151.5 66.3,151.5 79.68,138.12 81.59,138.12 84.31,135.4 84.31,126.24 100.19,110.36 100.19,76.85 91.65,68.31 89.33,68.31 84.81,63.78 84.81,60.16 83.8,59.15 81.89,59.15 79.36,56.62 79.36,48.11 58.31,27.06 v53.91,27.06
N$41
  Bottom 0.152: RELAY_2.CH4 49.83,27.9 51.5,29.58 51.5,35.61 53.62,37.73 55.82,37.73 73.13,55.03 73.13,75.66 75.25,77.78 75.25,99.39 84.4,108.54 84.4,112.27 83.4,113.28 83.4,115.09 81.49,117 81.49,122.63 78.77,125.35 77.26,125.35 68.41,134.2 68.41,136.41 63.18,141.65 63.18,141.95 I/O_EXPANDER_5.P3
N$42  (via drill 0.35)
  Top 0.152: v56.94,133.29 55.93,133.29 50.6,127.96 v50.6,127.46 | v50.6,125.45 50.6,115.79 51.91,114.48 51.91,111.16 57.63,105.44 57.63,97.97 59.14,96.47 59.14,79.17 64.77,73.54 64.77,50.69 v63.98,49.9
  Bottom 0.152: v56.94,133.29 63.08,139.43 I/O_EXPANDER_5.P4 | v50.6,125.45 v50.6,127.46 | v63.98,49.9 63.98,46.99 55.12,38.13 53.42,38.13 50.8,35.51 50.8,31.89 49.35,30.44 RELAY_2.CH5
N$43  (via drill 0.35)
  Top 0.152: v59.35,61.87 59.65,62.17 59.65,74.34 55.53,78.46 55.53,95.46 54.52,96.46 54.52,96.78 38.33,112.97 37.23,112.97 35.11,115.08 35.11,137.52 43.86,146.27 50.3,146.27 59.66,136.92 63.08,136.92 I/O_EXPANDER_5.P5
  Bottom 0.152: v59.35,61.87 66.29,68.81 68.41,68.81 70.01,67.2 70.01,61.86 63.18,55.03 63.18,47.28 54.42,38.53 53.22,38.53 50,35.31 50,34.2 48.79,33 RELAY_2.CH6
N$44  (via drill 0.35)
  Top 0.152: v49.8,128.16 v54.12,132.49 | v49.8,121.62 49.8,114.99 51.01,113.78 51.01,110.96 56.73,105.23 56.73,97.77 58.24,96.27 58.24,78.97 63.87,73.34 63.87,51.4 v62.37,49.9
  Bottom 0.152: v54.12,132.49 58.45,132.49 60.26,134.3 63.08,134.3 I/O_EXPANDER_5.P6 | v49.8,121.62 v49.8,128.16 | v62.37,49.9 62.37,47.58 53.72,38.93 52.11,38.93 48.79,35.61 RELAY_2.CH7
N$45  (via drill 0.35)
  Top 0.152: v85.61,113.28 81.09,117.8 76.86,117.8 72.23,122.43 72.23,124.24 64.69,131.79 63.18,131.79 I/O_EXPANDER_5.P7 | v54.02,35.91 50.9,35.91 48.79,38.03 RELAY_2.CH8
  Bottom 0.152: v85.61,113.28 85.61,106.44 77.46,98.28 77.46,53.81 58.66,35.02 54.92,35.02 v54.02,35.91
N$46
  Bottom 0.152: I/O_EXPANDER_1.P3 45.57,192.04 35.72,192.04 34.22,193.55 26.05,193.55 25.25,194.36 25.25,197.28 24.04,198.48 RJ45_2X4_MODULE.UP2-8
N$47
  Top 0.152: I/O_EXPANDER_1.P2 43.66,194.57 41.96,196.28 27.46,196.28 RJ45_2X4_MODULE.UP2-7
N$48
  Top 0.152: I/O_EXPANDER_1.P1 45.57,197.18 44.77,197.98 27.86,197.98 27.27,198.57 26.07,198.57 23.97,196.47 23.97,196.04 23.98,196.03 RJ45_2X4_MODULE.UP2-6
N$49
  Bottom 0.152: RJ45_2X4_MODULE.UP2-5 27.3,195.46 37.59,195.46 43.62,199.65 I/O_EXPANDER_1.P0
N$50
  Top 0.152: I/O_EXPANDER_2.P0 63.06,200.01 52.31,210.75 38.23,210.75 36.23,208.75 26.56,208.75 RJ45_2X4_MODULE.UP1-5
N$51
  Top 0.152: I/O_EXPANDER_2.P1 62.06,197.09 51.61,207.54 26.05,207.54 24.04,209.55 24.04,209.85 RJ45_2X4_MODULE.UP1-6
N$52
  Bottom 0.152: I/O_EXPANDER_2.P2 62.98,194.46 55.52,194.46 47.28,202.7 45.47,202.7 37.02,211.16 26.56,211.16 RJ45_2X4_MODULE.UP1-7
N$53
  Bottom 0.152: I/O_EXPANDER_2.P3 62.98,192.04 62.96,192.06 54.31,192.06 47.89,198.48 47.89,200.5 47.08,201.3 45.27,201.3 36.52,210.05 26.05,210.05 25.25,210.86 25.25,211.16 24.04,212.37 RJ45_2X4_MODULE.UP1-8
N$54
  Top 0.152: I/O_EXPANDER_2.P4 62.98,189.53 57.54,189.53 48.79,198.28 48.79,201.09 47.58,202.3 29.78,202.3 27.06,205.02 26.05,205.02 25.25,205.83 25.25,207.74 24.34,208.64 21.43,208.64 20.32,209.75 19.52,209.75 17.4,207.64 17.4,207.44 RJ45_2X4_MODULE.LP1-5
N$55
  Top 0.152: I/O_EXPANDER_2.P5 62.98,187.01 62.36,187.63 58.34,187.63 47.89,198.08 47.89,200.39 46.88,201.4 24.65,201.4 21.23,204.82 20.02,206.03 RJ45_2X4_MODULE.LP1-6
N$56
  Top 0.152: I/O_EXPANDER_2.P6 63.08,184.3 65.89,181.49 65.89,178.67 64.68,177.46 35.91,177.46 27.46,185.91 23.44,185.91 21.33,185.91 20.32,186.92 16.7,186.92 14.69,188.93 14.69,202.21 17.3,204.82 RJ45_2X4_MODULE.LP1-7
N$57
  Top 0.152: I/O_EXPANDER_2.P7 62.98,181.88 47.48,197.38 47.48,197.78 46.88,198.38 30.87,198.38 28.77,200.48 24.46,200.48 21.33,203.61 20.02,203.61 RJ45_2X4_MODULE.LP1-8
N$58
  Top 0.152: 15.59,163.6 15.59,160.16 7.85,152.42 7.85,122.28 9.77,120.36 U$26.CL 11.92,120.36 12.57,121.02 12.62,121.08 13.18,121.63 13.18,138.14 24.64,149.6 33.71,149.6 35.31,151.2 35.31,153.52 35.41,153.62 35.41,156.33 32.8,158.95 32.8,160.46 26.56,166.69 RJ45_2X4_MODULE.UP4-5 | 15.59,163.6 | 15.59,163.6 RJ45_2X4_MODULE.LP4-5
N$60
  Bottom 0.152: I/O_EXPANDER_4.P7 36.59,154.34 35.41,155.52 28.98,155.52 23.74,160.76 22.13,160.76 21.33,159.95 19.42,159.95 17.81,161.56 17.2,161.56 16.1,162.67 16.1,165.79 17.2,166.9 17.81,166.9 18.51,167.6 18.51,168.4 18.41,168.5 18.41,169.31 21.23,172.13 21.23,178.87 22.63,180.28 22.63,182.99 22.64,182.99 22.64,183.19 23.94,184.5 RJ45_2X4_MODULE.UP3-8
N$61
  Top 0.152: I/O_EXPANDER_4.P6 34.1,152.41 34.91,153.21 34.91,153.72 35.01,153.82 35.01,156.13 32.39,158.75 32.39,160.26 27.46,165.19 27.06,165.19 26.66,165.59 26.16,165.59 25.25,166.49 25.25,171.82 28.87,175.45 28.87,178.97 27.87,179.97 27.87,181.88 26.56,183.19 RJ45_2X4_MODULE.UP3-7
N$62  (via drill 0.35)
  Top 0.152: v15.29,164.38 15.29,163.98 14.69,163.37 14.69,160.36 9.51,155.18 5.59,155.18 4.23,156.54 4.23,158.8 15.14,169.71 15.14,184.75 16.2,185.81 20.12,185.81 23.94,181.99 RJ45_2X4_MODULE.UP3-6
  Bottom 0.152: v15.29,164.38 15.69,163.98 15.69,162.07 17.1,160.66 17.61,160.66 18.71,159.55 22.53,159.55 23.04,159.05 23.64,159.05 27.66,155.03 27.66,151.2 28.27,150.6 29.78,150.6 31.49,152.31 I/O_EXPANDER_4.P5
N$63  (via drill 0.35)
  Top 0.152: v27.87,160.46 26.76,159.35 26.76,154.52 28.87,152.41 I/O_EXPANDER_4.P4 | v30.48,164.48 29.98,164.48 28.27,166.19 v28.27,173.84 | v28.07,175.75 28.47,176.15 28.47,178.77 26.56,180.68 RJ45_2X4_MODULE.UP3-5
  Bottom 0.152: v27.87,160.46 27.87,162.27 30.08,164.48 v30.48,164.48 | v28.27,173.84 28.27,175.55 v28.07,175.75
N$64
  Top 0.152: I/O_EXPANDER_4.P0 18.71,152.41 18.71,160.66 18.41,160.96 18.41,162.37 18.51,162.47 18.51,163.47 18.41,163.58 18.41,164.98 18.51,165.09 18.51,174.84 18.41,174.94 18.41,176.35 18.51,176.45 18.51,178.26 17.4,179.37 RJ45_2X4_MODULE.LP3-5
N$65
  Top 0.152: I/O_EXPANDER_4.P1 21.33,152.41 21.33,156.53 19.21,158.65 19.21,160.76 18.81,161.16 18.81,162.17 18.91,162.27 18.91,163.68 18.81,163.78 18.81,164.68 19.72,165.59 20.32,165.59 21.02,166.29 21.02,172.93 18.81,175.15 18.81,176.15 19.92,177.26 RJ45_2X4_MODULE.LP3-6
N$66  (via drill 0.35)
  Top 0.152: v35.51,150.2 36.62,150.2 38.03,151.6 38.03,153.52 44.16,159.65 44.16,161.87 29.68,176.35 v29.68,177.36
  Bottom 0.152: v35.51,150.2 26.36,150.2 24.25,152.31 23.94,152.31 I/O_EXPANDER_4.P2 | v29.68,177.36 27.26,177.36 26.96,177.06 26.05,177.06 25.05,178.06 25.05,185 24.45,185.61 23.54,185.61 21.83,183.9 21.83,182.79 21.23,182.19 21.23,180.48 20.02,179.27 19.52,179.27 17.4,177.16 17.4,176.96 RJ45_2X4_MODULE.LP3-7
N$67
  Top 0.152: I/O_EXPANDER_4.P3 26.36,152.41 26.36,158.95 21.63,163.68 21.63,173.94 20.02,175.55 RJ45_2X4_MODULE.LP3-8
N$68  (via drill 0.35)
  Top 0.152: v52.71,111.47 52.71,111.87 52.71,115.49 v51.41,116.8 | v40.54,119.61 40.54,120.02 38.93,121.62 38.53,121.62 U$26.MISO
  Bottom 0.152: v52.71,111.47 50.7,113.48 44.97,113.48 4K7.1 | v51.41,116.8 43.36,116.8 v40.54,119.61
N$69
  Top 0.152: RJ45_2X4_MODULE.UP4-7 26.56,169.21 26.56,168.2 27.87,166.9 27.87,165.99 33.6,160.26 35.11,160.26 U$1.P$1
N$70
  Bottom 0.152: RJ45_2X4_MODULE.UP4-8 24.04,170.52 24.04,169.51 25.05,168.5 25.05,167.5 24.14,166.59 23.54,166.59 22.84,165.89 22.84,165.09 23.84,164.08 24.34,164.08 25.45,162.97 25.45,160.76 27.36,158.85 36.32,158.85 37.62,160.16 U$4.P$1
N$71
  Bottom 0.152: RJ45_2X4_MODULE.LP4-7 17.4,162.87 22.43,162.87 27.36,157.94 38.03,157.94 U$5.P$1
N$72  (via drill 0.35)
  Top 0.152: v23.24,159.85 21.53,161.56 20.02,161.56 RJ45_2X4_MODULE.LP4-8
  Bottom 0.152: v23.24,159.85 23.79,159.85 29.03,154.62 34.51,154.62 35.31,153.81 35.31,151.4 36.12,150.6 37.02,150.6 38.03,151.6 38.03,155.43 42.76,160.16 U$25.P$1
N$73
  Top 0.152: RJ45_2X4_MODULE.LP4-6 20.02,164.18 24.25,159.95 24.25,155.93 22.64,154.32 22.64,150.2 10.96,138.53 10.96,122.93 9.96,122.93 U$26.CH
  Bottom 0.152: RJ45_2X4_MODULE.LP4-6 20.02,164.28 23.74,168 23.94,168 RJ45_2X4_MODULE.UP4-6
SCL
  Top 0.152: ESP32-POE-ISO.16 82.89,58.05 81.18,59.76 81.18,69.93 69.41,81.7 69.41,95.67 67.49,97.58 67.49,109.21 U$21.P$1 66.4,110.36 66.4,110.76 64.89,112.27 63.88,112.27 63.07,113.07 57.04,113.07 56.34,113.78 56.34,116.29 53.41,119.21 53.41,123.49 53.42,123.54 53.32,123.54 I/O_EXPANDER_5.SCL | I/O_EXPANDER_1.SCL 35.81,173.64 38.83,176.65 50.1,176.65 53.12,173.64 I/O_EXPANDER_2.SCL
  Bottom 0.152: I/O_EXPANDER_3.SCL 70.72,173.64 69.41,174.94 64.58,174.94 61.47,171.82 54.93,171.82 53.22,173.53 I/O_EXPANDER_2.SCL 53.16,173.54 49.8,173.54 47.18,170.93 47.18,149.09 46.58,148.49 46.58,144.26 44.87,142.55 I/O_EXPANDER_4.SCL 44.87,142.45 44.87,141.44 53.32,132.99 53.32,128.67 | 53.32,128.67 53.32,123.64 I/O_EXPANDER_5.SCL | 53.32,128.67 57.14,128.67 59.86,125.95 61.87,125.95 64.28,123.54 70.72,123.54 I/O_EXPANDER_6.SCL
SDA  (via drill 0.35)
  Top 0.152: ESP32-POE-ISO.13 81.18,50.42 79.68,51.92 76.85,51.92 65.68,63.09 65.68,73.74 60.04,79.37 60.04,96.67 58.54,98.18 58.54,110.04 58.75,110.26 U$24.P$1 58.75,110.36 57.34,111.77 54.42,111.77 53.22,112.97 53.22,115.99 51,118.2 51,123.74 52.61,125.35 54.12,125.35 55.83,123.64 I/O_EXPANDER_5.SDA | 59.2,177.01 59.25,177.06 78.56,177.06 80.28,175.34 80.28,172.53 79.57,171.82 77.06,171.82 | 59.2,177.01 55.83,173.64 I/O_EXPANDER_2.SDA | 77.06,171.82 75.05,171.82 73.34,173.53 I/O_EXPANDER_3.SDA | v36.32,175.65 36.52,175.65 36.62,175.75 36.62,176.25 37.42,177.06 59.15,177.06 59.2,177.01 | 61.92,133.14 61.97,133.09 64.38,133.09 64.99,132.49 64.99,132.09 71.17,125.9 | 61.92,133.14 61.37,133.7 61.37,134.6 50.1,145.87 45.67,145.87 44.87,145.06 I/O_EXPANDER_4.SDA | 71.17,125.9 73.24,123.84 73.24,123.64 I/O_EXPANDER_6.SDA | v56.94,127.86 56.94,128.16 61.92,133.14 | 77.06,171.82 77.06,147.07 74.35,144.36 74.35,129.07 71.17,125.9
  Bottom 0.152: v36.32,175.65 38.33,173.64 I/O_EXPANDER_1.SDA | v56.94,127.86 56.44,127.86 55.83,127.26 55.83,126.96 55.03,126.15 55.03,124.84 55.83,124.04 55.83,123.64 I/O_EXPANDER_5.SDA

## Text on the board
tPlace: UP4-7 | UP4-8 | LP4-7 | LP4-8 | 5V | 3.3V | GND | EN | 0 | 1 | 2 | 3 | 4 | 5 | 13 | 14 | 15 | 16 | 32 | 33 | 34 | 35 | 36 | 39 | V1.0
bPlace: iModDom@ipleiria.pt
tNames: iModDom